# Altium PCB PCB1.PcbDoc (part 2 of 2)
Units mm, origin at the board's own origin, x right, y up, seen from the top; angles counter-clockwise.
Board outline 300 x 200 mm, 2 copper layers (Top Layer, Bottom Layer); 518 components, 359 nets, 1431 pads, 0 vias.
Unrouted connection lines stored in the file: 983.
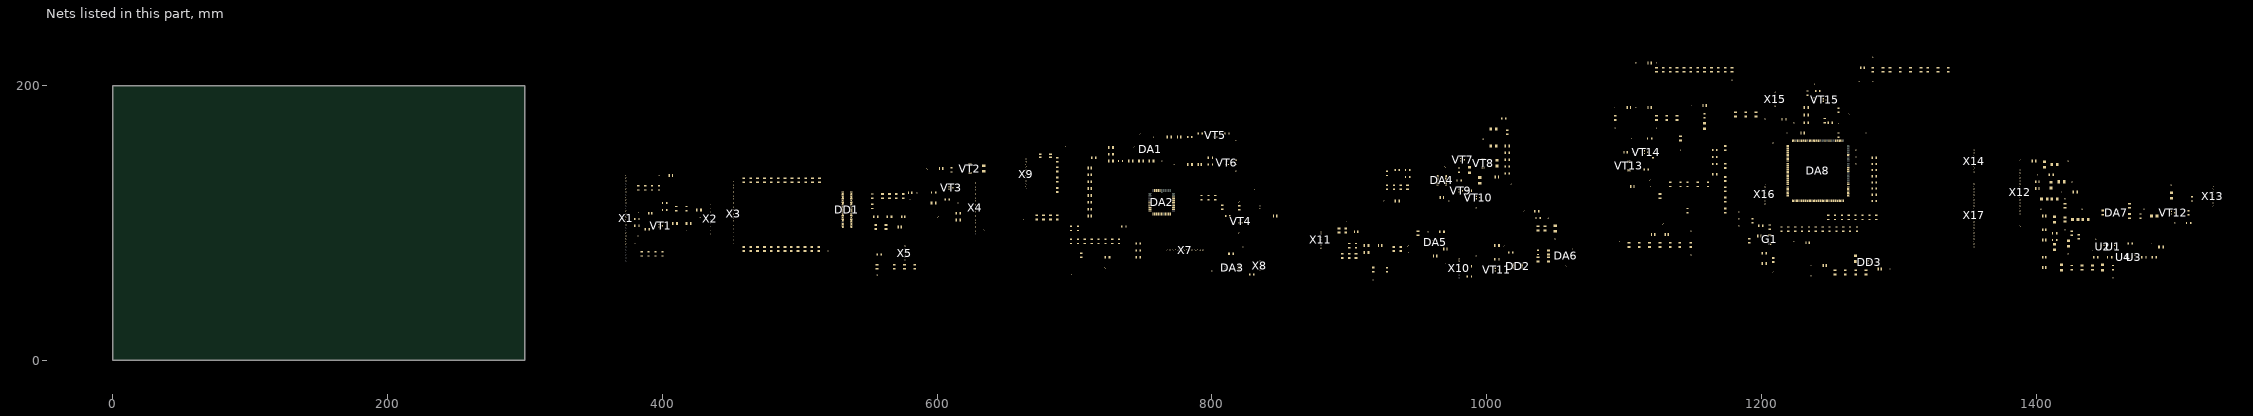
[diagram p2: the nets of this part, all layers, seen from the top]

## Part data
C1 C2 C3 C4 C5 C6 C7 C9 C10 C11 C12 C13 C14 C15 C16 C17 C18 C19 C20 C21 C23 C25 C26 C27 C28 C29 C30 C31 C32 C33 C34 C35 C36 C38 C39 C40 C41 C42 C43 C45 C46 C48 C49 C50 C51 C52 C53 C54 C55 C56 C57 C58 C59 C60 C61 C62 C63 C65 C66 C67 C68 C69 C71 C73 C74 C75 C76 C79 C81 C83 C84 C86 C87 C88 C89 C90 C91 C92 C93 C94 C95 C96 C98 C99 C100 C101 C102 C103 C104 C105 C106 C107 C108 C110 C111 C113 C114 C115 C116 C117 C118 C119 C120 C121 C122 C124 C125 C126 C127 C128 C129 C130 C131 C132 C133 C134 C135 C136 C137 C138 C139 C140 C141 C142 C143 C144 C145 C148 C149: library part Capacitor
C8 C22 C24 C37 C44 C47 C64 C70 C72 C77 C78 C80 C82 C85 C97 C109 C112 C123 C146 C147 C150: library part "Capacitor Duga"
DA1 DA6: library part IC103
DA2: library part NT68
DA3: library part IC102
DA4: library part AP494A
DA5: library part PQ05
DA7: library part MIC52
DA8: library part OMG
DD1: library part THC63
DD2: library part 74F74
DD3: library part MIC39
G1: library part MHZ25
GND31 GND33 GND34 GND35 GND38 GND39 GND41 GND42 GND44 GND49 GND56 GND57: library part GND
L1 L2 L3 L4 L5 L6 L7 L8 L9 L10 L11 L12 L13 L14 L15 L16 L17 L18 L19 L20 L21 L22 L23 L24 L25 L26 L27 L28 L29 L30 L31 L32 L33 L34 L35 L36 L37 L38 L39 L40 L41 L42 L43 L44 L45 L46 L47: library part Inductor
R1 R2 R3 R4 R5 R6 R7 R8 R9 R10 R11 R12 R13 R14 R15 R16 R17 R18 R19 R20 R21 R22 R23 R24 R25 R26 R27 R28 R29 R30 R31 R32 R33 R34 R35 R36 R37 R38 R39 R40 R41 R42 R43 R44 R45 R46 R47 R48 R49 R50 R51 R52 R53 R54 R55 R56 R57 R58 R59 R60 R61 R62 R63 R64 R65 R66 R67 R68 R69 R70 R71 R72 R73 R74 R75 R76 R77 R78 R79 R80 R81 R82 R83 R84 R85 R86 R87 R88 R89 R90 R91 R92 R93 R94 R95 R96 R97 R98 R99 R100 R101 R102 R103 R104 R105 R106 R107 R108 R109 R110 R111 R112 R113 R114 R115 R116 R117 R118 R119 R120 R121 R122 R123 R124 R125 R126 R127 R128 R129 R130 R131 R132 R133 R134 R135 R136 R137 R138 R139 R140: library part Resistor
U1 U2 U3 U4: library part "Schmitt Inv"
VCC1 VCC2 VCC3 VCC4 VCC5 VCC6 VCC7 VCC8 VCC9 VCC10 VCC11 VCC12 VCC13 VCC14 VCC15 VCC16 VCC17 VCC18 VCC19 VCC20 VCC21 VCC22 VCC23 VCC24 VCC25 VCC26 VCC27 VCC28 VCC29 VCC30 VCC31 VCC32 VCC33 VCC34 VCC35 VCC36 VCC37 VCC38 VCC39 VCC40 VCC41 VCC42 VCC43 VCC44 VCC45 VCC46 VCC47 VCC48 VCC49 VCC50: library part VCC
VD2 VD3 VD4 VD8 VD9 VD10 VD11 VD12 VD13 VD14 VD16 VD18 VD23 VD24: library part "Diode 1"
VD6 VD7 VD15 VD17 VD19 VD20 VD21 VD22: library part "Diode 2"
VT1 VT3 VT4 VT7 VT11 VT14 VT15: library part "Transistor 1"
VT5 VT6 VT12: library part "Transistor 2"
VT9: library part "Transistor 1_1"
VT10: library part "Transistor 2_1"
X1: library part "DVI Connector"
X2: library part "All pins"
X3 X8: library part J102
X4: library part DF14A
X5 X6: library part Inputs
X7 X13: library part Outputs
X9: library part J101
X10: library part Connector
X11: library part J601
X12: library part "VGA connector"
X14: library part "Outputs 1"
X15: library part "Inputs 1"
X16: library part "Inputs 2"
X17: library part NBuses

## Nets (pads, with @x,y where several pads share a name; then routed paths per layer and width w, separated by ;. In a path a pad name is that pad's centre, name@x,y a point inside that pad or via, vN(x,y) a via of type N, cw(c..) or ccw(c..) an arc to the next point about the centre after c; other vN are vias at no path point)
ADCPWR_CTL: DA2.36 R26.1 R100.1 X7.9 X15.1
AH: C93.2 DA8.141 R82.2 X13.7 X15.5
AV: C94.2 DA8.140 R84.2 X13.8 X15.6
B_IN: C89.2 L28.2 R89.1 VD13.1 VD14.2 X13.3 X15.4
BACKLIG_ON_OFF: R28.2 R71.2 VT4.2 X7.13 X10.1
BO0: C32.2 DD1.16 R117.1 X3.17 X17.17
BO1: C31.2 DD1.19 R118.1 X3.18 X17.18
BO2: C30.2 DD1.20 R120.1 X3.19 X17.19
BO3: C29.2 DD1.21 R122.1 X3.20 X17.20
BO4: C28.2 DD1.22 DD1.23 R125.1 X3.21 X17.21
BO5: C27.2 R127.1 X3.22 X17.22
BO6: C26.2 DD1.17 R130.1 X3.23 X17.23
BO7: C25.2 DD1.18 R133.1 X3.24 X17.24
BPCLK: DD1.46 R20.2
BRIGHTNESS: R73.2 R97.1 VT15.2 X10.2 X14.9
CSG2: DA8.55 L46.2
CSG4: DA8.127 R110.2
DVI_DETN: DA2.31 X6.1
DVI_SCL: DA2.28 X7.8
DVI_SDA: DA2.27 X7.7
EXIT: DA2.23 L19.2 R38.1
G_IN: C87.2 C130.2 L27.2 R95.1 VD10.1 VD11.2 X13.2 X15.3
GO0: C17.1 DD1.8 R119.1 X3.9 X17.9
GO1: C18.1 DD1.9 R121.1 X3.10 X17.10
GO2: C19.1 DD1.10 R124.1 X3.11 X17.11
GO3: C20.1 DD1.13 R129.1 X3.12 X17.12
GO4: C36.2 DD1.14 R132.1 X3.13 X17.13
GO5: C35.2 DD1.15 R135.1 X3.14 X17.14
GO6: C34.2 DD1.11 R137.1 X3.15 X17.15
GO7: C33.2 DD1.12 R139.1 X3.16 X17.16
LED_G: C54.2 L9.1 X9.12
LED_G_CTL: DA2.2 R45.1
LED_R: C52.2 L8.1 X9.11
LED_R_CTL: DA2.3 R41.1
LEFT: DA2.22 L18.2 R37.1
LVDSPWR: DA2.33 DD1.47 X5.6 X7.11
MINUS: DA2.20 L16.2 R35.1
NetC1_1: C1.1 C2.1 C3.1 GND1.1
NetC1_2: C1.2 R7.2 R8.2 VCC2.1
NetC2_2: C2.2 R6.2 R7.1 X2.5
NetC3_2: C3.2 R5.2 R8.1 X2.6
NetC4_1: C4.1 GND2.1 R10.1 VT1.1
NetC4_2: C4.2 R9.2 R10.2 VT1.3
NetC5_1: C5.1 C6.1 C7.1 C8.1 C21.1 C22.1 C23.1 C24.1 DD1.39 DD1.41 DD1.42 DD1.43 DD1.45 DD1.52 DD1.53 DD1.54 DD1.55 DD1.56 GND5.1 R16.2
NetC5_2: C5.2 C6.2 C7.2 C8.2 DD1.48 DD1.49 DD1.51 L3.1 R15.2
NetC9_2: C9.2 C10.2 C11.2 C12.2 C13.2 C14.2 C15.2 C16.2 C17.2 C18.2 C19.2 C20.2 GND4.1
NetC21_2: C21.2 C22.2 DD1.44 L4.1
NetC23_2: C23.2 C24.2 DD1.40 L5.1
NetC25_1: C25.1 C26.1 C27.1 C28.1 C29.1 C30.1 C31.1 C32.1 C33.1 C34.1 C35.1 C36.1 GND6.1
NetC37_1: C37.1 C38.1 C39.1 GND8.1 R19.2 VT3.1
NetC40_1: C40.1 C41.1 C42.1 C43.1 GND9.1
NetC44_1: C44.1 C45.2 C46.2 GND10.1
NetC44_2: C44.2 C45.1 C46.1 DA2.5 L7.1 R21.2
NetC47_1: C47.1 C48.2 C49.2 DA1.1 DA1.2 GND11.1
NetC47_2: C47.2 C48.1 DA1.4 DA2.4 R21.1
NetC49_1: C49.1 DA1.5 VCC7.1
NetC50_1: C50.1 C51.1 GND13.1
NetC52_1: C52.1 GND14.1
NetC53_1: C53.1 C55.1 C56.1 C58.1 GND16.1 L10.2 L11.2
NetC53_2: C53.2 L12.1 X9.3
NetC54_1: C54.1 GND15.1
NetC55_2: C55.2 L13.1 X9.4
NetC56_2: C56.2 L14.1 X9.5
NetC57_1: C57.1 DA3.4 GND17.1 R49.1 X8.3
NetC57_2: C57.2 DA3.5 VCC12.1 X8.2
NetC58_2: C58.2 L15.1 X9.6
NetC59_1: C59.1 C60.1 C61.1 C62.1 GND18.1
NetC59_2: C59.2 L19.1 X9.10
NetC60_2: C60.2 L18.1 X9.9
NetC61_2: C61.2 L17.1 X9.8
NetC62_2: C62.2 L16.1 X9.7
NetC63_1: C63.1 C64.1 C65.1 GND20.1 VD2.1 VD3.1
NetC63_2: C63.2 C64.2 L20.2 R50.1 R51.1
NetC65_2: C65.2 R53.1
NetC66_1: C66.1 DA4.7
NetC66_2: C66.2 DA4.1 DA4.8 GND21.1 L22.1 R56.1 R57.1 R60.1
NetC67_1: C67.1 DA4.5 R58.1
NetC67_2: C67.2 R59.1
NetC68_1: C68.1 C69.1 DA5.5 GND23.1
NetC68_2: C68.2 DA5.1 L21.1
NetC69_2: C69.2 L23.2
NetC70_1: C70.1 C71.1 GND24.1 VD7.1
NetC70_2: C70.2 C71.2 R63.1 R64.1 VCC16.1 VD7.2
NetC72_1: C72.1 C73.1 C74.1 DA6.1 DA6.2 DD2.5 GND28.1
NetC72_2: C72.2 C73.2 DA6.4 DD2.4 R66.1
NetC74_2: C74.2 DA6.5 DD2.6 GND25.1 R65.2 R66.2
NetC75_1: C75.1 L24.1 X11.5 X11.6
NetC75_2: C75.2 C76.2 GND26.1
NetC77_1: C77.1 GND27.1 R70.1 VT11.1
NetC77_2: C77.2 R68.2 R69.1
NetC78_1: C78.1 C79.1 C80.1 C81.1 GND29.1 X11.3 X11.4
NetC78_2: C78.2 C79.2 L24.2 L25.1
NetC80_2: C80.2 C81.2 L25.2 VCC19.1
NetC82_1: C82.1 C83.1 C84.1 C85.2 GND30.1
NetC82_2: C82.2 C83.2 R72.1 X11.1
NetC84_2: C84.2 R71.1 X11.2
NetC85_1: C85.1 R72.2 R73.1
NetC86_1: C86.1 GND31.1 VD8.1
NetC87_1: C87.1 GND33.1 VD10.2
NetC88_1: C88.1 C90.1 C91.1 DA7.2 GND32.1
NetC88_2: C88.2 DA7.1 DA7.3 R77.1 VD16.2 VD18.2
NetC89_1: C89.1 GND34.1 VD13.2
NetC90_2: C90.2 DA7.4
NetC91_2: C91.2 DA7.5 R77.2 VD15.2 VT12.2
NetC92_1: C92.1 GND38.1 VD17.1
NetC92_2: C92.2 L29.2 VD16.1 VD17.2
NetC93_1: C93.1 C94.1 GND41.1
NetC95_1: C95.1 C96.1 GND42.1 R86.1 R87.1 VD21.1 VD22.1
NetC95_2: C95.2 L33.2 R85.1 R86.2 VD21.2
NetC96_2: C96.2 L32.2 R83.1 R87.2 VD22.2
NetC97_1: C97.1 C98.1 C99.1 C100.1 C101.1 C102.1 C103.1 C104.1 C105.1 C106.1 C107.1 C108.1 GND43.1
NetC97_2: C97.2 C98.2 C99.2 C100.2 C101.2 C102.2 C103.2 C104.2 C105.2 C106.2 C107.2 C108.2 L34.2 VCC27.1
NetC109_1: C109.1 C110.1 C111.1 DA8.1 DA8.10 DA8.12 DA8.19 GND44.1 R91.1 VD23.1
NetC109_2: C109.2 C110.2 C111.2 DA8.159 L35.2 R88.2
NetC112_1: C112.1 C113.1 C114.1 C115.1 C116.1 C117.1 C118.1 C119.1 C120.1 GND45.1
NetC112_2: C112.2 C113.2 C114.2 C115.2 C116.2 C117.2 C118.2 C119.2 C120.2 L36.2 VCC29.1
NetC121_1: C121.1 DA8.8
NetC121_2: C121.2 GND46.1
NetC122_1: C122.1 DA8.2
NetC122_2: C122.2 R89.2 R90.2
NetC123_1: C123.1 C128.2 C131.2 DA8.149
NetC123_2: C123.2 C128.1 C131.1 DA8.150 L38.2
NetC124_1: C124.1 GND47.1
NetC124_2: C124.2 L39.1 VCC34.1
NetC125_1: C125.1 C126.1 C127.1 GND48.1
NetC125_2: C125.2 C126.2 C127.2 L37.2 VCC33.1
NetC129_1: C129.1 DA8.4
NetC129_2: C129.2 R92.2
NetC130_1: C130.1 DA8.11
NetC132_1: C132.1 DA8.13
NetC132_2: C132.2 R95.2 R96.2
NetC133_1: C133.1 DA8.15
NetC133_2: C133.2 R98.2
NetC134_1: C134.1 DA8.20
NetC134_2: C134.2 R99.2 R102.2
NetC135_1: C135.1 DA8.22
NetC135_2: C135.2 R104.2
NetC136_1: C136.1 L42.1 VCC44.1
NetC136_2: C136.2 C137.1 C138.1 C139.1 G1.2 GND55.1
NetC137_2: C137.2 C138.2 G1.4 L42.2
NetC139_2: C139.2 DA8.47 R112.2
NetC140_1: C140.1 C141.1 C142.1 C143.1 C144.1 C145.1 C146.1 GND57.1
NetC140_2: C140.2 C141.2 C142.2 L43.1 VCC46.1
NetC143_2: C143.2 C144.2 C145.2 L44.2 VCC48.1
NetC146_2: C146.2 L43.2 L44.1 VCC47.1
NetC147_1: C147.1 C148.1 C149.1 C150.1 DD3.3 GND59.1
NetC147_2: C147.2 C148.2 DD3.1 L47.2 VD24.1
NetC149_2: C149.2 C150.2 DD3.2 L45.1 VD24.2
NetDA2_12: DA2.12 R23.1 R31.2
NetDA2_13: DA2.13 R22.1 R32.2
NetDA2_34: DA2.34 R30.1 R40.1
NetDA4_2: DA4.2 R54.1 R56.2
NetDA4_4: DA4.4 R55.1 R57.2 R58.2 R59.2
NetDA4_6: DA4.6 R60.2
NetDA4_9: DA4.9 DA4.12 DA4.14 GND19.1
NetDA4_10: DA4.10 L22.2 VT9.2
NetDA4_11: DA4.11 R61.2 VT9.1
NetDA4_13: DA4.13 DA4.15 R52.1 VD4.2 VT7.3
NetDA4_16: DA4.16 R52.2 VCC14.1 VD5.2 VT7.2 VT8.3 VT8.4
NetDA5_3: DA5.3 L23.1 VCC15.1
NetDA8_3: DA8.3 DA8.14 DA8.21 GND52.1
NetDA8_6: DA8.6 DA8.17 DA8.24 DA8.29 DA8.35 DA8.39 DA8.40 VCC39.1
NetDA8_9: DA8.9 R93.2
NetDA8_26: DA8.26 DA8.38
NetDA8_43: DA8.43 R109.2
NetDA8_44: DA8.44 R111.2
NetDA8_45: DA8.45 DA8.48 DA8.56 DA8.66 DA8.70 DA8.78 GND54.1
NetDA8_46: DA8.46 DA8.71 R109.1 R111.1 VCC42.1
NetDA8_49: DA8.49 DA8.57 DA8.67 DA8.79
NetDA8_50: DA8.50 R113.2
NetDA8_52: DA8.52 R114.2
NetDA8_53: DA8.53 R115.2
NetDA8_54: DA8.54 R116.2
NetDA8_58: DA8.58 R117.2
NetDA8_59: DA8.59 R118.2
NetDA8_60: DA8.60 R120.2
NetDA8_61: DA8.61 R122.2
NetDA8_62: DA8.62 R125.2
NetDA8_63: DA8.63 R127.2
NetDA8_64: DA8.64 R130.2
NetDA8_65: DA8.65 R133.2
NetDA8_68: DA8.68 R119.2
NetDA8_69: DA8.69 R121.2
NetDA8_72: DA8.72 R124.2
NetDA8_73: DA8.73 R129.2
NetDA8_74: DA8.74 R132.2
NetDA8_75: DA8.75 R135.2
NetDA8_76: DA8.76 R137.2
NetDA8_77: DA8.77 R139.2
NetDA8_80: DA8.80 R140.1
NetDA8_81: DA8.81 R138.1
NetDA8_82: DA8.82 R136.1
NetDA8_83: DA8.83 R134.1
NetDA8_84: DA8.84 R131.1
NetDA8_85: DA8.85 R128.1
NetDA8_86: DA8.86 R126.1
NetDA8_87: DA8.87 R123.1
NetDA8_88: DA8.88 DA8.90 DA8.100 DA8.102 DA8.112 GND56.1
NetDA8_89: DA8.89 DA8.101 DA8.113 VCC43.1
NetDA8_91: DA8.91 DA8.103 VCC45.1
NetDA8_122: DA8.122 DA8.124 DA8.131 DA8.142 DA8.144 DA8.146 DA8.151 DA8.153 DA8.154 DA8.155 DA8.156 DA8.158 GND49.1
NetDA8_123: DA8.123 DA8.145 DA8.147 DA8.152 L38.1 VCC35.1
NetDA8_125: DA8.125 DA8.132 DA8.143 VCC41.1
NetDA8_126: DA8.126 R108.1
NetDA8_135: DA8.135 R106.1
NetDA8_139: DA8.139 R101.1 R103.1
NetDA8_160: DA8.160 R91.2
NetDD1_50: DD1.50 R15.1 R16.1
NetDD2_1: DD2.1 R65.1
NetDD2_2: DD2.2 DD2.7
NetDD2_3: DD2.3 R67.2 VCC18.1 VT11.2
NetG1_3: G1.3 R112.1
NetGND3_1: GND3.1 X1.3 X1.11 X1.15 X1.19 X1.22 X1.25 X1.26
NetGND7_1: GND7.1 X4.2 X4.5 X4.8 X4.11 X4.14 X4.17 X4.18
NetGND12_1: GND12.1 VT4.1
NetGND22_1: GND22.1 VT10.2
NetGND35_1: GND35.1 X12.16 X12.17
NetGND36_1: GND36.1 R76.1 VD15.1
NetGND37_1: GND37.1 X12.4 X12.5 X12.6 X12.7 X12.8 X12.10 X12.11
NetGND39_1: GND39.1 U2.3
NetGND40_1: GND40.1 VD19.1 VD20.1
NetGND50_1: GND50.1 R105.1 VT14.1
NetGND51_1: GND51.1 R106.2 R107.1 VT15.1
NetGND53_1: GND53.1 R110.1
NetGND58_1: GND58.1 L46.1
NetL1_1: L1.1 VCC1.1
NetL1_2: L1.2 R1.2 R2.2 R3.2 R4.2
NetL2_1: L2.1 VCC3.1
NetL2_2: L2.2 VT1.2 X2.7
NetL3_2: L3.2 L4.2 L5.2 VCC4.1
NetL6_1: L6.1 VCC5.1
NetL6_2: L6.2 R17.2 VD1.2 VT2.3 VT2.4
NetL7_2: L7.2 VCC6.1
NetL8_2: L8.2 R44.1
NetL9_2: L9.2 R47.1
NetL10_1: L10.1 X9.1
NetL11_1: L11.1 X9.2
NetL20_1: L20.1 R53.2 VD2.2 VD3.2 VD5.1 VT8.2
NetL26_1: L26.1 X12.1
NetL27_1: L27.1 X12.2
NetL28_1: L28.1 X12.3
NetL29_1: L29.1 X12.9
NetL30_1: L30.1 X12.12
NetL30_2: L30.2 R80.1 VD20.2
NetL31_1: L31.1 X12.15
NetL31_2: L31.2 R81.1 VD19.2
NetL32_1: L32.1 X12.13
NetL33_1: L33.1 X12.14
NetL34_1: L34.1 VCC28.1
NetL35_1: L35.1 VCC30.1
NetL36_1: L36.1 VCC31.1
NetL37_1: L37.1 L39.2 VCC32.1
NetL40_1: L40.1 VT13.3 VT13.4
NetL40_2: L40.2 VCC36.1
NetL41_1: L41.1 VT13.2
NetL41_2: L41.2 VCC40.1
NetL45_2: L45.2 VCC49.1
NetL47_1: L47.1 VCC50.1
NetR1_1: R1.1 X1.2 X2.1
NetR2_1: R2.1 X1.1 X2.2
NetR3_1: R3.1 X1.10 X2.3
NetR4_1: R4.1 X1.9 X2.4
NetR5_1: R5.1 X1.6
NetR6_1: R6.1 X1.7
NetR9_1: R9.1 X1.14 X1.16
NetR11_1: R11.1 R12.1 R13.1 R14.1 X2.12
NetR11_2: R11.2 X1.23 X2.11
NetR12_2: R12.2 X1.24 X2.10
NetR13_2: R13.2 X1.17 X2.9
NetR14_2: R14.2 X1.18 X2.8
NetR17_1: R17.1 VT2.1 VT3.2
NetR18_2: R18.2 R19.1 VT3.3
NetR25_2: R25.2 R26.2 R27.2 R28.1 R30.2 VCC8.1
NetR31_1: R31.1 R32.1 R33.1 R34.1 VCC9.1
NetR40_2: R40.2 VT4.3
NetR41_2: R41.2 R43.2 VT5.3
NetR43_1: R43.1 VCC10.1 VT5.2
NetR44_2: R44.2 VT5.1
NetR45_2: R45.2 R46.2 VT6.3
NetR46_1: R46.1 VCC11.1 VT6.2
NetR47_2: R47.2 VT6.1
NetR50_2: R50.2 R51.2 VCC13.1
NetR62_1: R62.1 VT9.3
NetR63_2: R63.2 R64.2 VCC17.1
NetR69_2: R69.2 R70.2 VT11.3
NetR74_2: R74.2 R75.2 VCC22.1 VD12.1 VD12.2 VT12.1
NetR75_1: R75.1 VT12.3
NetR78_2: R78.2 R79.2 VCC25.1
NetR82_1: R82.1 U1.5
NetR83_2: R83.2 U2.2
NetR84_1: R84.1 U3.5
NetR85_2: R85.2 U4.2
NetR88_1: R88.1 VD23.2
NetR94_1: R94.1 VT13.1 VT14.2
NetR94_2: R94.2 VCC37.1
NetR97_2: R97.2 R101.2 VCC38.1
NetR100_2: R100.2 R105.2 VT14.3
NetR103_2: R103.2 R107.2 VT15.3
NetU1_2: U1.2 U2.5
NetU2_1: U2.1 VCC26.1
NetU3_2: U3.2 U4.5
NetVCC20_1: VCC20.1 VD9.2
NetVCC21_1: VCC21.1 VD11.1
NetVCC23_1: VCC23.1 VD14.1
NetVCC24_1: VCC24.1 VD18.1
NetVD4_1: VD4.1 VT7.1 VT8.1
NetVD6_1: VD6.1 VT10.3
NEXT: DA2.18 L14.2 R39.2
p_3_3_v: DA4.3 VD6.2
PANELVCC_CTL: C39.2 DA2.35 R18.1 R27.1 X5.5 X7.10
PC_DET: DA2.30 R74.1 R76.2 X6.2 X13.4
PCLK: C40.2 R20.1 R114.1 X5.4 X14.3
PDE: C41.2 DD1.27 R108.2 X5.3 X14.8
PHD: C43.2 DD1.25 R115.1 X5.1 X14.2
PLUS: DA2.19 L15.2 R42.2
PVCC: C37.2 C38.2 VD1.1 VT2.2 X4.19 X4.20
PVD: C42.2 DD1.26 R116.1 X5.2 X14.1
PWR_EN: DD2.8 R61.1 R62.2 VT10.1
PWR_SW: L12.2 R48.1 R67.1 R68.1 X7.1 X10.4
R_IN: C86.2 L26.2 R90.1 R92.1 R93.1 R96.1 R98.1 R99.1 R102.1 R104.1 VD8.2 VD9.1 X13.1 X15.2
RESET: DA2.17 L13.2 R29.2
RIGHT: DA2.21 L17.2 R36.1
RO0: C9.1 DD1.1 R140.2 X3.1 X17.1
RO1: C10.1 DD1.2 R138.2 X3.2 X17.2
RO2: C11.1 DD1.3 R136.2 X3.3 X17.3
RO3: C12.1 DD1.4 R134.2 X3.4 X17.4
RO4: C13.1 DD1.5 R131.2 X3.5 X17.5
RO5: C14.1 DD1.7 R128.2 X3.6 X17.6
RO6: C15.1 DD1.28 R126.2 X3.7 X17.7
RO7: C16.1 DD1.6 R123.2 X3.8 X17.8
RX0+: DA8.33 X16.5
RX0-: DA8.34 X16.6
RX1+: DA8.30 X16.3
RX1-: DA8.31 X16.4
RX2+: DA8.5 DA8.7 DA8.16 DA8.18 DA8.23 DA8.25 DA8.27 X16.1
RX2-: DA8.28 X16.2
RXC+: DA8.37 X16.7
RXC-: DA8.36 X16.8
SCALER_INTN: C51.2 DA2.15 R24.1 R29.1 R34.2 R35.2 R36.2 R37.2 R38.2 R39.1 R42.1 R113.1 X7.14 X14.5
SCALER_RSTN: C50.2 DA2.14 DA8.51 R33.2 X7.4 X14.4
SCL: DA3.7 DA8.42 R23.2 X7.3 X8.4 X14.7
SDA: DA3.8 DA8.41 R22.2 X7.2 X8.1 X14.6
SOFT_PW: DA2.16 R24.2 R48.2
TP_CTL: DA2.32 DA5.2 X7.12 X10.3
TP_PWR: C76.1 L21.2 X11.7
TX0+: DD1.37 X4.15
TX0-: DD1.38 X4.16
TX1+: DD1.35 X4.12
TX1-: DD1.36 X4.13
TX2+: DD1.33 X4.9
TX2-: DD1.34 X4.10
TX3+: DD1.29 X4.3
TX3-: DD1.30 X4.4
TXC+: DD1.31 X4.6
TXC-: DD1.32 X4.7
VGA_SCL: DA2.26 R78.1 R81.2 X7.6 X13.6
VGA_SDA: DA2.25 R79.1 R80.2 X7.5 X13.5
Vref: R54.2 R55.2
WP: DA2.37 DA3.6 R25.1 R49.2
pads on no net: DA1.3 DA2.1 DA2.6 DA2.7 DA2.8 DA2.9 DA2.10 DA2.11 DA2.24 DA2.29 DA2.38 DA2.39 DA2.40 DA2.41 DA2.42 DA2.43 DA2.44 DA3.1 DA3.2 DA3.3 DA5.4 DA6.3 DA8.32 DA8.92 DA8.93 DA8.94 DA8.95 DA8.96 DA8.97 DA8.98 DA8.99 DA8.104 DA8.105 DA8.106 DA8.107 DA8.108 DA8.109 DA8.110 DA8.111 DA8.114 DA8.115 DA8.116 DA8.117 DA8.118 DA8.119 DA8.120 DA8.121 DA8.128 DA8.129 DA8.130 DA8.133 DA8.134 DA8.136 DA8.137 DA8.138 DA8.148 DA8.157 DD1.24 G1.1 U1.1 U1.3 U1.4 U2.4 U3.1 U3.3 U3.4 U4.1 U4.3 U4.4 X1.4 X1.5 X1.8 X1.12 X1.13 X1.20 X1.21 X1.27 X1.28 X1.29 X1.30 X1.31 X1.32 X4.1 X10.5 X10.6 X10.7 X10.8

## Keep-outs
Keep-Out Layer:
  lines w0.254: -24.873,0 275.127,0 ; 0,0 0,200 300,200 300,0